# EAGLE board Cool Crift-Amberis (EAGLE 7.6.0)

Size 56.82 x 53.33 mm. Coordinates in mm from the lower left corner, seen from the top.
Outline: 0,0 56.82,0 56.82,53.33 0,53.33 0,0
Copper layers (1*16): Top 0.035mm / dielectric 1.5mm / Bottom 0.035mm
Design rules "default": minimum track width 10mil, minimum drill 24mil, track to track 8mil, track to pad 8mil, pad to pad 8mil, via to via 8mil, smd to smd 8mil, copper to edge 40mil, drill to drill 8mil, minimum pad ring 10mil, minimum via ring 8mil, stop-mask expansion 4mil, vias tented up to drill 0mil, thermal gap 10mil

## Footprints (pad centres in the part's own frame; a part is rotated, then mirrored left to right if it is on the bottom)
DC-POWER = drill 0.889 pad 2.54 octagon: + 0,2.54; - 0,-2.54
0207/10 = drill 0.813 octagon: 1 -5.08,0; 2 5.08,0

## Placement (x,y rotation side)
BAT1  [DC-POWER]  5,10.08 0 top
Meter2  [DC-POWER]  5,60.88 0 top  (outside the outline)
Meter6  [DC-POWER]  5,73.58 0 top  (outside the outline)
Meter7  [DC-POWER]  5,86.28 0 top  (outside the outline)
Meter8  [DC-POWER]  5,98.98 0 top  (outside the outline)
R3  9k‎Ω  [0207/10]  5,35.48 0 top
R4  8k‎Ω  [0207/10]  5,48.18 0 top
R5  5k‎Ω  [0207/10]  5,22.78 0 top

## Library data of the parts
BAT1 Meter2 Meter6-Meter8 R3-R5 = AUTODESK_CIRCUITS_BREADBOARD

## Nets
N$1: BAT1.+ Meter2.+
N$2: Meter2.- Meter6.+ R4.2
N$3: Meter6.- Meter7.+ R3.2 R4.1
N$4: Meter7.- Meter8.+ R3.1 R5.2
N$5: BAT1.- Meter8.- R5.1

## Tracks (layer width: path | path; a pad name or v marks a point on that pad's centre or on a via)
N$1  (1 unrouted)
N$2  (2 unrouted)
N$3  (3 unrouted)
N$4  (3 unrouted)
N$5  (2 unrouted)